# Altium PCB 06电机驱动模块TB6612-2.PcbDoc
Units mil, origin at the board's own origin, x right, y up, seen from the top; angles counter-clockwise.
Board outline 6000 x 4000 mil, 2 copper layers (Top Layer, Bottom Layer); 7 components, 34 nets, 165 pads, 34 vias.
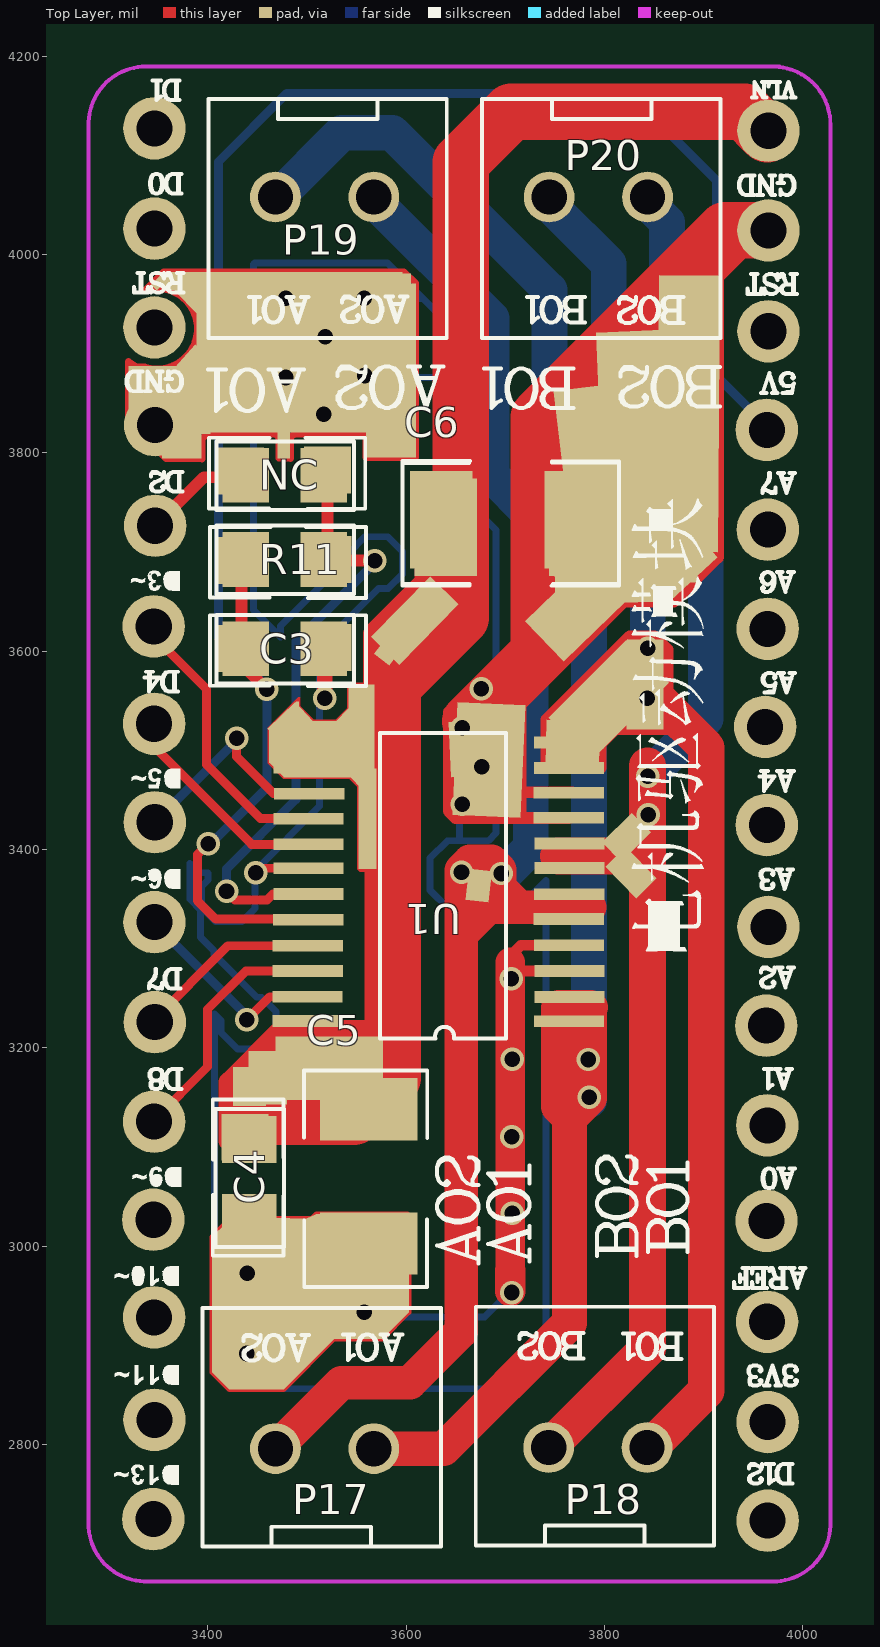
[diagram p0: Top Layer view]
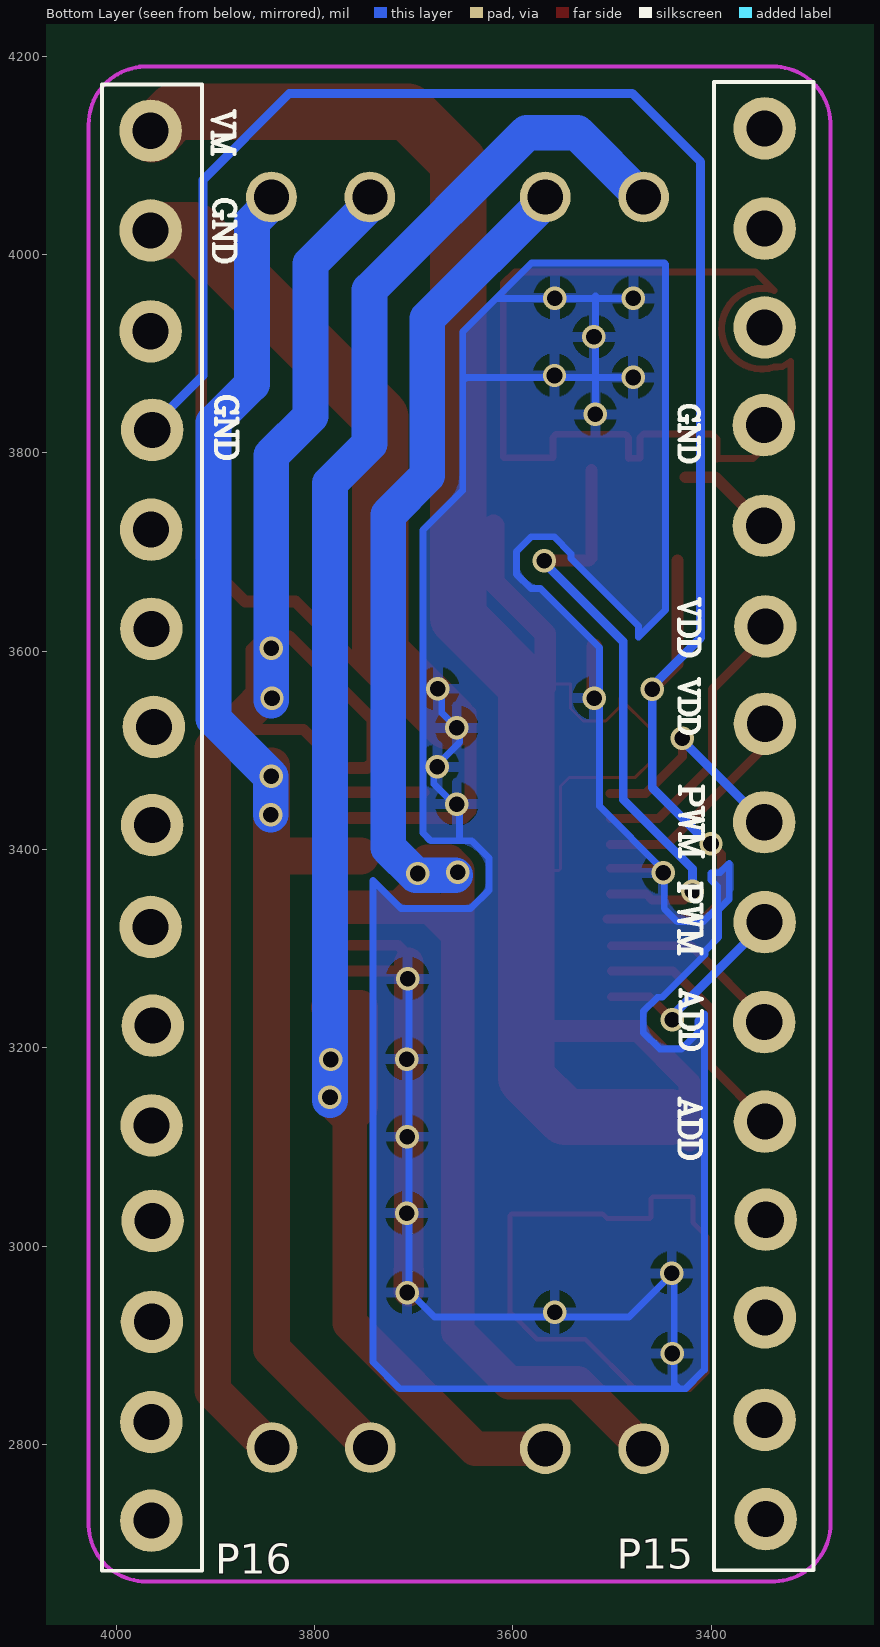
[diagram p1: Bottom Layer view, seen from below]
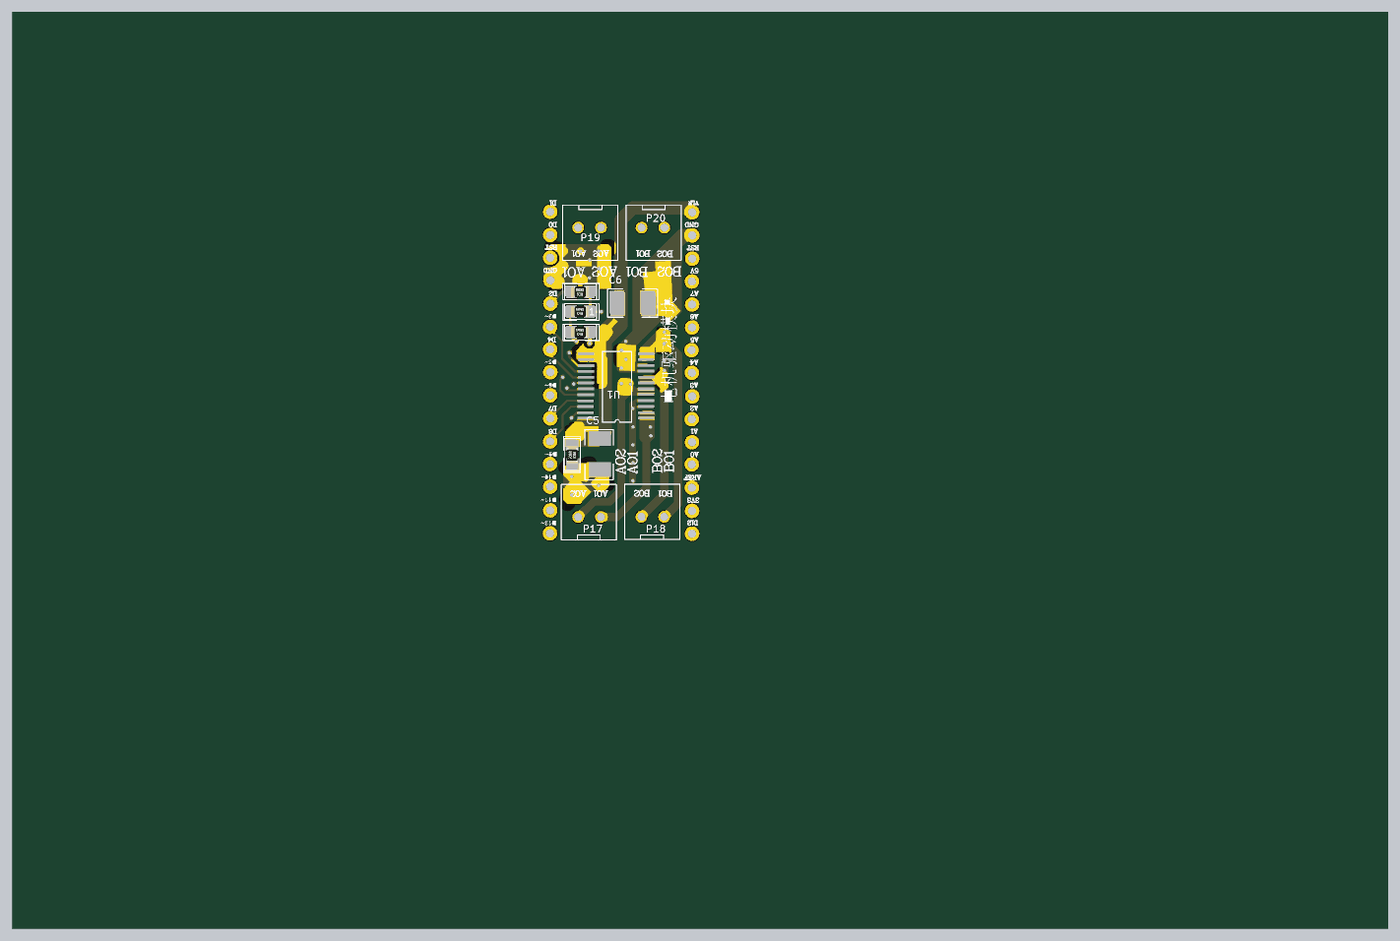
[diagram p2: 3D render of the assembled board from above, using the file's embedded part models]

## Layer stack, top to bottom
Top Solder: solder mask 0.4, Solder Resist, Dk 3.5
Top Layer: signal copper 1.4
Dielectric1: dielectric 12.6, FR-4, Dk 4.8
Bottom Layer: signal copper 1.4
Bottom Solder: solder mask 0.4, Solder Resist, Dk 3.5

## Board outline
1000,1000 7000,1000 7000,5000 1000,5000

## Design rules (kind name [scope] priority, off if disabled: settings)
Clearance [All] p1: gap=10 ignorepadtopadclearanceinfootprint=FALSE except(0: Arc-Hole Track-Hole SMDPad-Hole THPad-Hole Via-Hole Fill-Hole Poly-Hole Region-Hole Text-Hole)
PolygonConnect [All] p1: connectstyle=Relief reliefconductorwidth=10 reliefentries=4 polygonreliefangle="90 Angle" airgapwidth=10
RoutingVias [All] p1: holewidth=28 width=50 viastyle="Through Hole" minholewidth=28 minwidth=50 maxholewidth=28 maxwidth=50
SilkToSolderMaskClearance SilkscreenOverComponentPads [IsPad] p1: minsilkscreentomaskgap=10 clearancetoexposedcopper=TRUE
SolderMaskExpansion [All] p1: expansion=4
Width [All] p1: maxlimit=10 minlimit=10 preferedwidth=10
29 further rules are at their usual default settings.

## Components (designator, comment, footprint, x,y, rotation, side; value= is the part's Value field where it differs from the comment)
C3 "104 50V 10%" 0805-R 3477.49,3602.58 r180 top
C4 "104 50V 10%" 0805-R 3441.74,3068.33 r270 top
C5 "Comment" sma 3564.36,3068.69 r270 top
C6 "Comment" sma 3705.83,3722.76 r180 top
NC "1K 5%" 0805-R 3477.49,3777.58 r180 top
R11 "200K 5%" 0805-R 3477.49,3692.58 r180 top
U1 "6621FNG" sop24 3640.34,3372.19 r0 top

## Footprints (in the part's own frame and the unit in brackets; to place one, negate y for a bottom-side part, rotate by r counter-clockwise, add the part's x,y. Pads: shape width x height; smd on the part's side, far side on the other; paste and mask are expansions set on the pad)
0805-R [mm]
  rect 1.2x1.4 smd: 1(-1,0) 2(1,0)
  silkscreen extent -1.78,-0.86 1.75,0.89, body extent -0.97,-0.61 1.03,0.64, height 0.55
sma [mil]
  rect 62.99x98.43 smd paste+0 mask+2: 1(-69.49,-2.24) 1(65.83,-2.24)
  silkscreen extent -109,-67 110,57
sop24 [mil]
  rect 70.87x11.81 smd paste+0 mask+2: 1(-140,-145) 1(-140,-120.59) 1(-139.64,-94.64) 1(-139.64,-69.1) 1(-139.29,-42.79) 1(-138.93,-16.84) 1(-138.93,9.06) 1(-138.93,33.11) 1(-138.93,59.06) 1(-138.93,135.73) 1(-138.57,110.55) 1(-138.16,84.24) 1(123.37,-42.12) 1(123.63,59.83) 1(123.63,85.26) 1(123.84,-145.1) 1(123.84,-68.59) 1(123.84,110.19) 1(123.84,135.88) 1(124.09,-17.2) 1(124.35,-120.89) 1(124.35,-94.49) 1(124.35,9.21) 1(124.35,33.93)
  silkscreen extent -67,-163 60,146

## Free pads (board coordinates)
  rect 18.02x8.36 smd rot 45 paste-9.01 mask+24.99: 1(3351.88,3973.14)
  rect 10.67x9.14 smd paste-5.33 mask+28.66: 1(3354.31,3971.58)
  rect 75.44x16.89 smd paste-37.72 mask-3.72: 1(3357.49,3879.03)
  rect 82.97x54.92 smd paste-41.48 mask-7.49: 1(3361.25,3846.51)
  rect 39.82x34.96 smd paste-19.91 mask+14.09: 1(3373.77,3811.7)
  rect 47.19x18.32 smd paste-23.59 mask+10.4: 1(3378.88,3973.31)
  rect 33.73x24.43 smd rot 134.38 paste-16.86 mask+17.14: 1(3386.87,3959.77)
  rect 31.06x27.02 smd rot 48.01 paste-15.53 mask+18.47: 1(3386.93,3888.8)
  rect 0.2x31.22 smd paste-15.61 mask+33.9: 1(3421.62,2871.23)
  rect 24.54x44.19 smd rot 135 paste-22.09 mask+21.73: 1(3428.47,2879.92)
  rect 50.31x39.67 smd paste-25.16 mask+8.85: 1(3429.32,2893.31)
  rect 19.98x54 smd rot 45 paste-27 mask+24.01: 1(3430.32,2997.69)
  rect 47.24x47.24 smd paste+0 mask+2: 1(3432.98,3781.63) 1(3433.75,3602.76) 1(3433.75,3691.66) 1(3437.49,3109.93) 1(3438.46,3022.26) 1(3520.66,3782.61) 1(3521.42,3603.73) 1(3521.42,3692.63)
  rect 40.08x20.88 smd paste-20.04 mask+13.96: 1(3438.9,3039.56)
  rect 33.47x39.41 smd paste-19.7 mask+17.27: 1(3441.94,3161.12)
  rect 55.17x33.68 smd paste-27.58 mask+6.42: 1(3449.11,2872.45)
  rect 38.95x53.79 smd paste-26.89 mask+14.53: 1(3460.34,3170)
  rect 112.02x51.5 smd rot 5.9 paste-56.01 mask-22.01: 1(3462.53,2989.87)
  rect 71.73x100.54 smd rot 45 paste-50.27 mask-1.86: 1(3466.1,2916.52)
  rect 20.22x34.5 smd paste-17.25 mask+23.89: 1(3471.5,3504.74)
  rect 12.9x33.37 smd paste-16.68 mask+27.55: 1(3476.44,3811.22)
  rect 21.28x23.13 smd rot 135 paste-11.56 mask+23.36: 1(3477.09,3488.61)
  rect 44.44x65.78 smd rot 178.68 paste-32.89 mask+11.78: 1(3481.92,2995.73)
  rect 26.43x38.72 smd rot 133.51 paste-19.36 mask+20.79: 1(3483.19,3525.82)
  rect 171.41x40.69 smd paste-85.7: 1(3489.87,2926.68)
  rect 3.43x4.35 smd paste-2.17 mask+32.28: 1(3490.33,3547.05)
  rect 207.74x161.84 smd paste-103.87 mask-69.87: 1(3492.43,3901.55)
  rect 70.87x11.81 smd paste+0 mask+2: 1(3500.34,3227.19) 1(3500.34,3251.6) 1(3500.7,3277.55) 1(3500.7,3303.09) 1(3501.05,3329.4) 1(3501.41,3355.35) 1(3501.41,3381.25) 1(3501.41,3405.3) 1(3501.41,3431.25) 1(3501.41,3507.92) 1(3501.77,3482.74) 1(3502.18,3456.43) 1(3763.71,3330.07) 1(3763.97,3432.02) 1(3763.97,3457.45) 1(3764.18,3227.09) 1(3764.18,3303.6) 1(3764.18,3482.38) 1(3764.18,3508.07) 1(3764.43,3354.99) 1(3764.69,3251.3) 1(3764.69,3277.7) 1(3764.69,3381.4) 1(3764.69,3406.12)
  rect 198.48x60.85 smd paste-99.24: 1(3503.41,2963.84)
  rect 11.53x20.87 smd rot 23.27 paste-10.43 mask+28.23: 1(3508.28,3020.78)
  rect 73.29x56.76 smd paste-36.64 mask-2.64: 1(3513.08,3501.29)
  rect 11.21x18.78 smd paste-9.39 mask+28.39: 1(3515.05,3023.26)
  rect 107.97x63.95 smd paste-53.98 mask-19.98: 1(3522.36,3179.73)
  rect 17.81x16.07 smd rot 45 paste-8.9 mask+25.09: 1(3541.08,3530.18)
  rect 25.26x22.21 smd rot 131.96 paste-12.63 mask+21.37: 1(3551.69,3480.67)
  rect 26.51x93.81 smd paste-46.91 mask+20.75: 1(3554.95,3519.61)
  rect 18.27x101.7 smd paste-50.85 mask+24.86: 1(3561.01,3431.17)
  rect 98.43x62.99 smd paste+0 mask+2: 1(3562.12,3002.86) 1(3562.12,3138.19)
  rect 38.29x51.46 smd rot 45 paste-25.73 mask+14.86: 1(3570.92,2938.07)
  rect 20.68x19.34 smd rot 52.85 paste-10.34 mask+23.66: 1(3581.23,3599.58)
  rect 50.21x175.29 smd paste-87.64 mask+8.89: 1(3584.5,3883)
  rect 19.91x19.34 smd rot 0.15 paste-9.95 mask+24.05: 1(3592.67,2943.06)
  rect 13.92x24.67 smd paste-12.34 mask+27.04: 1(3597.94,3968.34)
  rect 85.67x40.21 smd rot 45.56 paste-42.84 mask-8.84: 1(3608.56,3630.93)
  rect 62.99x98.43 smd paste+0 mask+2: 1(3635.51,3732.76) 1(3770.83,3732.76)
  rect 21.88x56.12 smd rot 2.55 paste-28.06 mask+23.06: 1(3654.95,3501.05)
  rect 23.28x31.8 smd rot 173.56 paste-15.9 mask+22.36: 1(3673.03,3363.68)
  rect 68.89x113.81 smd rot 177.38 paste-56.9 mask-0.44: 1(3683.44,3490.43)
  rect 53.85x47.83 smd rot 179.18 paste-26.93 mask+7.08: 1(3767.88,3506.75)
  rect 130.96x56.36 smd rot 43.99 paste-65.48 mask-31.48: 1(3786.14,3655.41)
  rect 70.05x110.59 smd rot 6.84 paste-55.3 mask-1.02: 1(3789.88,3811.67)
  rect 110.6x61.23 smd rot 45 paste-55.3 mask-21.3: 1(3804.2,3550.65)
  rect 115.87x56.1 smd rot 1.65 paste-57.94 mask-23.93: 1(3807.77,3676.48)
  rect 42.42x27.78 smd rot 44.8 paste-21.21 mask+12.79: 1(3822.08,3412.44)
  rect 44.84x28.81 smd rot 134.49 paste-22.42 mask+11.58: 1(3826.61,3376.78)
  rect 37.08x91.05 smd rot 179.72 paste-45.52 mask+15.46: 1(3840.82,3566.64)
  rect 91.9x256.41 smd rot 2.39 paste-128.21 mask-11.95: 1(3842.36,3795.39)
  rect 65.97x86.88 smd rot 42.39 paste-43.44 mask+1.01: 1(3860.49,3704.42)
  rect 279.02x61.75 smd rot 89.53 paste-139.51: 1(3884.4,3839.51)
  round 51.18 hole 35.43: 4(3468.04,2795.99) 4(3468.04,4057.96) 4(3567.28,2795.99) 4(3567.28,4057.96) 4(3743.6,2797.11) 4(3744.11,4057.96) 4(3842.84,2797.11) 4(3843.35,4057.96)
  round 62.99 hole 36.43: 5(3345,2725) 5(3345,3026.87) 5(3345.36,3625.02) 5(3345.77,2928.34) 5(3345.77,3125.75) 5(3345.77,3526.86) 5(3346.13,2825.01) 5(3346.13,3326.89) 5(3346.13,3926.48) 5(3346.13,4026.13) 5(3346.13,4127.21) 5(3346.49,3226.11) 5(3346.49,3427.61) 5(3346.84,3726.51) 5(3346.84,3827.96) 5(3961.84,3523.68) 5(3962.96,3222.58) 5(3963.22,3025.64) 5(3963.53,3424.8) 5(3963.53,3823.14) 5(3963.78,2923.94) 5(3964.09,3122.01) 5(3964.34,2723.41) 5(3964.34,2822.86) 5(3964.4,3622.61) 5(3964.6,3722.57) 5(3965.17,3322.03) 5(3965.17,3922.59) 5(3965.17,4024.23) 5(3965.17,4124.8)

## Via types
v1: diameter 23.62, hole 15.75, Top Layer to Bottom Layer, 34 vias

## Nets (pads, with @x,y where several pads share a name; then routed paths per layer and width w, separated by ;. In a path a pad name is that pad's centre, name@x,y a point inside that pad or via, vN(x,y) a via of type N, cw(c..) or ccw(c..) an arc to the next point about the centre after c; other vN are vias at no path point)
$Net0: C3.1 C4.2 C5.1@3562.12,3002.86 C6.1@3775.32,3725 pad.1@3351.88,3973.14 pad.1@3354.31,3971.58 pad.1@3357.49,3879.03 pad.1@3361.25,3846.51 pad.1@3373.77,3811.7 pad.1@3378.88,3973.31 pad.1@3386.87,3959.77 pad.1@3386.93,3888.8 pad.1@3421.62,2871.23 pad.1@3428.47,2879.92 pad.1@3429.32,2893.31 pad.1@3430.32,2997.69 pad.1@3438.9,3039.56 pad.1@3438.46,3022.26 pad.1@3449.11,2872.45 pad.1@3462.53,2989.87 pad.1@3466.1,2916.52 pad.1@3476.44,3811.22 pad.1@3481.92,2995.73 pad.1@3489.87,2926.68 pad.1@3492.43,3901.55 pad.1@3501.41,3381.25 pad.1@3503.41,2963.84 pad.1@3508.28,3020.78 pad.1@3515.05,3023.26 pad.1@3521.42,3603.73 pad.1@3562.12,3002.86 pad.1@3570.92,2938.07 pad.1@3584.5,3883 pad.1@3592.67,2943.06 pad.1@3597.94,3968.34 pad.1@3654.95,3501.05 pad.1@3683.44,3490.43 pad.1@3763.97,3432.02 pad.1@3763.97,3457.45 pad.1@3764.18,3303.6 pad.1@3764.69,3277.7 pad.1@3770.83,3732.76 pad.1@3786.14,3655.41 pad.1@3789.88,3811.67 pad.1@3807.77,3676.48 pad.1@3842.36,3795.39 pad.1@3860.49,3704.42 pad.1@3884.4,3839.51 pad.5@3346.84,3827.96 pad.5@3965.17,4024.23 U1.1@3501.41,3381.25 U1.1@3763.97,3432.02 U1.1@3763.97,3457.45 U1.1@3764.18,3303.6 U1.1@3764.69,3277.7 | length 8989.2
  Top Layer w4.94: C4.2@3460.47,3029.12 3460.47,3048.46 3458.93,3050 3418.86,3050 3418.29,3049.44 3418.29,3023.85 3404.17,3009.72 3404.17,2872.97 3421.52,2855.62 3476.28,2855.62 3527.01,2906.34 3575.57,2906.34 3602.65,2933.41 3602.65,3031.32 3601.32,3032.65 3509.45,3032.65 3504.9,3028.1 C4.2@3461.49,3028.1
  Top Layer w6.94: pad.1@3319.77,3828.11 3319.77,3892.03 3328.27,3886.81 3333.28,3886.66 3336.35,3886.56 3339.08,3885.78 3341.85,3885.2 3344.66,3884.81 3347.49,3884.62 3350.33,3884.63 3353.16,3884.84 3355.96,3885.24 3358.74,3885.83 3361.46,3886.62 3364.12,3887.6 3366.71,3888.76 3369.21,3890.1 3371.61,3891.6 3373.9,3893.28 3376.07,3895.1 3378.1,3897.08 3380,3899.19 3381.74,3901.43 3383.32,3903.78 3384.73,3906.24 3385.97,3908.8 3387.02,3911.43 3387.89,3914.13 3388.57,3916.88 3389.06,3919.67 3389.35,3922.5 3389.44,3925.33 3389.33,3928.16 3389.03,3930.98 3388.53,3933.77 3387.84,3936.52 3386.95,3939.22 3385.88,3941.85 3384.64,3944.39 3383.21,3946.84 3381.62,3949.19 3379.87,3951.42 3377.97,3953.52 3375.92,3955.49 3373.74,3957.31 3371.45,3958.97 3369.04,3960.46 3366.53,3961.79 3363.94,3962.94 3361.27,3963.9 3358.54,3964.67 3355.77,3965.26 3352.96,3965.65 3350.13,3965.84 3347.29,3965.83 3344.46,3965.62 3341.66,3965.22 3338.88,3964.63 3336.35,3963.89 3336.71,3963.89 3355.29,3982.47 3597.79,3982.47 3609.61,3970.65 3609.61,3795.92 3608.79,3795.1 3559.66,3795.1 3559.4,3795.35 3559.4,3815.67 3556.28,3818.79 3486.57,3818.79 3483.19,3815.42 3483.19,3794.23 3482.88,3794.53 3471.57,3794.53 3471.88,3794.84 3471.88,3815.36 3468.2,3819.05 3399.05,3819.05 3393.98,3813.98 3393.98,3793.92 3393.68,3794.23 3357.85,3794.23 3327.35,3824.73 3323.15,3824.73 pad.1@3319.77,3828.11
  Top Layer w8.94: v1(3448.44,3376.59) 3453.1,3381.25 pad.1@3501.41,3381.25
  Top Layer w10.94: 3709.11,3296.95 3715.76,3303.6 pad.1@3764.18,3303.6 ; v1@3712.54,3277.7 pad.1@3764.69,3277.7
  Top Layer w11.94: 3651.17,3547.02 3642.77,3538.63 3642.77,3438.83 3649.58,3432.02 pad.1@3763.97,3432.02 ; pad.1@3690.12,3457.81 pad.1@3767.35,3457.81 ; 3715.25,3432.02 3715.25,3546.3 3819.04,3650.1 3869.66,3650.1 3914.14,3694.57 3914.14,3976.48 pad.5@3946.53,4008.88
  Top Layer w15.94: v1(3517.9,3552.7) C3.1@3517.9,3604.75
  Top Layer w29.94: 3704.96,2975.89 3704.96,3286.3
  Top Layer w30.94: v1@3704.96,2954.91 3704.96,2975.89
  Top Layer w56.94: pad.1@3664.63,3529.57 3733.47,3598.41 3733.47,3836.04 3921.66,4024.23 pad.5@3965.17,4024.23
  Bottom Layer w6.94: 3406.83,2875.52 3406.83,3234.15 3413.28,3227.7 3413.28,3215.37 3429.71,3198.94 3451.77,3198.94 3468.5,3215.67 3468.5,3236.91 3454.27,3251.14 3449.41,3251.14 3405.91,3294.65 3405.91,3298.43 3392.7,3311.64 3392.7,3339.11 3381.74,3350.07 3381.74,3386.12 3391.17,3376.69 3399.72,3376.69 3400.23,3376.18 3400.23,3369.52 3393.73,3363.02 3393.73,3341.58 3408.06,3327.25 3433.7,3327.25 3447.32,3340.86 3447.32,3378.63 3512.42,3443.74 3512.42,3603.63 3571.99,3663.2 3581.82,3663.2 3596.25,3677.63 3596.25,3700.46 3581.26,3715.46 3558.43,3715.46 3541.23,3698.26 3541.23,3693.45 3473.21,3625.43 3473.21,3614.12 3445.83,3641.5 3445.83,3990.2 3447.21,3991.58 3580.95,3991.58 3650.45,3922.08 3650.45,3762.08 3690.37,3722.16 3690.37,3416.56 3682.7,3408.88 3641.34,3408.88 3623.99,3391.53 3623.99,3359.03 3642.47,3340.56 3712.64,3340.56 3741.04,3368.96 3741.04,2883.51 3713.97,2856.43 3425.92,2856.43 3408.01,2874.35 ; 3432.42,2856.43 3437.18,2861.19 3437.18,2974.41 3482.88,2928.7 3679.11,2928.7 3704.81,2954.39 v1@3704.81,3275.4 ; v1(3478.38,3955.75) 3616.78,3955.75 ; v1(3478.64,3876.06) 3646.87,3876.06 3650.45,3872.48 ; v1(3516.77,3838.8) 3516.77,3958.41 ; 3654.24,3408.88 3653.83,3409.29 3653.83,3440.31 3679.63,3466.1 3679.63,3482.28 3653.42,3508.48 3653.42,3519.49 3671.59,3537.65 v1@3671.59,3560.53
  other v1: 3439.18,2892 3557.71,2933.51 3706.44,2953.42 3439.74,2972.72 3706.91,3033.47 3706.44,3110.5 3706.91,3188.8 3706.04,3269.67 3656.49,3445.78 3675.99,3483.45 3656.49,3522.81 3675.58,3562.22 3557.97,3878.01 3518.15,3916.96 3557.56,3956.06
$Net1: NC.1 pad.1@3501.41,3355.35 pad.1@3520.66,3782.61 pad.1@3521.42,3692.63 R11.1 U1.1@3501.41,3355.35 | length 621.5
  Top Layer w8.94: v1(3418.81,3357.96) 3427.4,3349.36 3459.7,3349.36 3465.69,3355.35 pad.1@3501.41,3355.35
  Top Layer w11.94: NC.1@3520.66,3782.61 3520.66,3693.81 3523.11,3691.35 v1(3568.36,3691.35)
  Bottom Layer w8.94: v1(3418.81,3357.96) 3418.81,3380.68 3488.67,3450.54 3488.67,3609.72 3568.36,3689.41 v1(3568.36,3691.35)
$Net2: C3.2 pad.1@3433.75,3602.76 pad.1@3433.75,3691.66 pad.1@3501.05,3329.4 pad.5@3963.53,3823.14 R11.2 U1.1@3501.05,3329.4 | length 1899.5
  Top Layer w8.94: v1(3400.18,3405.76) 3389.38,3394.96 3389.38,3348.54 3408.06,3329.86 pad.1@3505.1,3329.86
  Top Layer w11.94: R11.2@3433.75,3691.66 3433.75,3587.25 v1(3459.44,3561.56)
  Bottom Layer w8.94: v1(3400.18,3405.76) 3402.84,3405.76 3459.44,3462.37 3459.44,3564.88 3410.67,3613.66 3410.67,4093.43 3479.66,4162.42 3825.14,4162.42 3912.5,4075.06 3912.5,3877.91 3963.53,3826.88 pad.5@3963.53,3823.14
$Net3: pad.1@3502.18,3456.43 pad.5@3346.49,3427.61 U1.1@3502.18,3456.43 | length 229.5
  Top Layer w8.94: v1(3428.99,3512.47) 3428.99,3493.74 3466.3,3456.43 pad.1@3502.18,3456.43
  Bottom Layer w8.94: pad.5@3346.49,3427.61 3431.55,3512.68 v1@3431.55,3514.47
$Net4: pad.1@3500.34,3251.6 pad.5@3346.13,3326.89 U1.1@3500.34,3251.6 | length 207.8
  Top Layer w8.94: v1(3439.13,3228.42) 3462.31,3251.6 pad.1@3500.34,3251.6
  Bottom Layer w8.94: pad.5@3346.13,3326.89 3346.13,3325.61 3439.13,3232.61 v1(3439.13,3228.42)
$Net5: pad.1@3764.18,3227.09 pad.1@3764.69,3251.3 pad.4@3468.04,4057.96 pad.4@3567.28,2795.99 U1.1@3764.18,3227.09 U1.1@3764.69,3251.3 | length 1978.5
  Top Layer w34.94: pad.4@3567.28,2795.99 3637.76,2795.99 3764.53,2922.77 3764.53,3129.59 3753.38,3140.75 3753.38,3240.7 3753.69,3241.01 3785.83,3241.01 3784.96,3240.14 3784.96,3149.29 3767.45,3131.79
  Bottom Layer w32.94: pad.4@3464.05,4056.53 pad.4@3468.81,4056.53
  Bottom Layer w35.94: pad.4@3468.81,4056.53 3534.94,4122.66 ; 3528.28,4116 3534.94,4122.66 ; 3551.47,4122.66 3585.97,4122.66 3744.47,3964.15 3744.47,3842.18 ; 3566.67,4122.66 3534.94,4122.66 ; 3744.47,3867.62 3744.47,3809.22 3784.29,3769.4 v1@3784.29,3147.45
  other v1: 3784.34,3150.32 3783.52,3188.39
$Net6: pad.1@3673.03,3363.68 pad.1@3763.71,3330.07 pad.1@3764.43,3354.99 pad.4@3468.04,2795.99 pad.4@3567.28,4057.96 U1.1@3763.71,3330.07 U1.1@3764.43,3354.99 | length 1766.4
  Top Layer w33.94: pad.4@3468.04,2795.99 3534.58,2862.52 3603.72,2862.52 3655.37,2914.17 3655.37,3379.15 3664.17,3387.95 3686.18,3387.95 3694.26,3379.86 3694.26,3361.59 3713.81,3342.04 3785.16,3342.04 ; 3655.37,3294.8 3655.37,3314.4 3683,3342.04 3725.69,3342.04
  Bottom Layer w35.94: pad.4@3567.28,4057.96 3567.28,4054.28 3686.13,3935.43 3686.13,3777.13 3725.48,3737.77 3725.48,3401.98 3697.64,3374.13 v1@3657.87,3374.13
  other v1: 3695.9,3375.92 3655.67,3377.2
$Net7: pad.1@3764.18,3482.38 pad.1@3764.18,3508.07 pad.1@3767.88,3506.75 pad.1@3804.2,3550.65 pad.1@3840.82,3566.64 pad.4@3744.11,4057.96 pad.4@3842.84,2797.11 U1.1@3764.18,3482.38 U1.1@3764.18,3508.07 | length 1749.4
  Top Layer w10.94: pad.1@3764.18,3482.38 3796.42,3482.38 3796.37,3482.43 3796.37,3506.28 3811.11,3521.02 3864.54,3521.02
  Top Layer w11.94: pad.1@3764.18,3482.38 3747.03,3482.38 3741.3,3488.11 3741.3,3531.05 3825.29,3615.04 3850.26,3615.04 3863.67,3601.63 3863.67,3558.69
  Top Layer w36.94: pad.4@3841.46,2793.28 3902.62,2854.44 3902.62,3502.75 pad.1@3858.09,3547.28
  Bottom Layer w35.94: pad.4@3748.01,4058.22 3748.01,4046.75 3803.99,3990.76 3803.99,3837.11 3843.51,3797.61 v1@3843.51,3550.4
  other v1: 3842.79,3552.45 3843.61,3602.86
$Net8: pad.1@3764.69,3381.4 pad.1@3764.69,3406.12 pad.1@3822.08,3412.44 pad.1@3826.61,3376.78 pad.4@3743.6,2797.11 pad.4@3843.35,4057.96 U1.1@3764.69,3381.4 U1.1@3764.69,3406.12 | length 1469.8
  Top Layer w36.94: pad.4@3743.6,2797.11 3843.25,2896.77 v1@3843.25,3484.53 ; 3753.22,3393.58 3837.11,3393.58
  Bottom Layer w35.94: v1(3844.07,3435.19) 3844.07,3474.09 3901.8,3531.82 3901.8,3830.61 3862.96,3869.46 3862.96,4032.63 pad.4@3848.98,4046.6
  other v1: 3843.61,3474.14
$Net9: pad.5@3346.13,4026.13
$Net10: pad.5@3346.13,3926.48
$Net11: pad.5@3346.13,4127.21
$Net12: C4.1 C5.1@3562.12,3138.18 C6.1@3640,3725 pad.1@3437.49,3109.93 pad.1@3441.94,3161.12 pad.1@3460.34,3170 pad.1@3471.5,3504.74 pad.1@3477.09,3488.61 pad.1@3483.19,3525.82 pad.1@3490.33,3547.05 pad.1@3500.34,3227.19 pad.1@3501.41,3507.92 pad.1@3501.77,3482.74 pad.1@3513.08,3501.29 pad.1@3522.36,3179.73 pad.1@3541.08,3530.18 pad.1@3551.69,3480.67 pad.1@3554.95,3519.61 pad.1@3561.01,3431.17 pad.1@3562.12,3138.19 pad.1@3581.23,3599.58 pad.1@3608.56,3630.93 pad.1@3635.51,3732.76 pad.5@3965.17,4124.8 U1.1@3500.34,3227.19 U1.1@3501.41,3507.92 U1.1@3501.77,3482.74 | length 2285.7
  Top Layer w2.94: 3565.8,3378.84 3553.36,3378.84 3551.88,3380.32 3551.88,3463.85 3542.82,3472.91 3476.44,3472.91 3461.39,3487.96 3461.39,3521.99 3492.05,3552.65 3492.05,3543.85 3506.33,3529.57 3529.1,3529.57 3541.69,3542.16 3541.69,3566.52 3541.39,3566.83 3563.7,3566.83 pad.1@3567.28,3563.25
  Top Layer w21.94: C4.1@3421.83,3106.71 3421.83,3165.16 3473.88,3217.21 3572.96,3217.21 3586.53,3203.65 ; pad.1@3567.28,3563.25 3567.28,3617.45 3619.39,3669.55 pad.1@3619.39,3726.72
  Top Layer w56.94: C4.1@3441.27,3130.41 3547.12,3130.41 3586.53,3169.82 3586.53,3565.45 3654.85,3633.77 3654.85,4092.87 3706.09,4144.1 3941.11,4144.1 pad.5@3963.94,4121.27
$Net13: pad.5@3965.17,3922.59
$Net14: pad.5@3964.6,3722.57
$Net15: pad.5@3964.4,3622.61
$Net16: pad.5@3961.84,3523.68
$Net17: pad.5@3963.53,3424.8
$Net18: pad.5@3965.17,3322.03
$Net19: pad.5@3962.96,3222.58
$Net20: pad.5@3964.09,3122.01
$Net21: pad.5@3963.22,3025.64
$Net22: pad.5@3963.78,2923.94
$Net23: pad.5@3964.34,2822.86
$Net24: pad.5@3964.34,2723.41
$Net25: pad.5@3345,2725
$Net26: pad.5@3346.13,2825.01
$Net27: pad.5@3345.77,2928.34
$Net28: pad.5@3345,3026.87
$Net29: pad.1@3500.7,3277.55 pad.5@3345.77,3125.75 U1.1@3500.7,3277.55 | length 252.6
  Top Layer w8.94: pad.5@3345.77,3125.75 3345.77,3127.28 3399.61,3181.13 3399.61,3238.91 3438.26,3277.55 pad.1@3500.7,3277.55
$Net30: pad.1@3500.7,3303.09 pad.5@3346.49,3226.11 U1.1@3500.7,3303.09 | length 189.4
  Top Layer w8.94: pad.5@3343.21,3226.11 3420.19,3303.09 pad.1@3500.7,3303.09
$Net31: pad.1@3501.41,3405.3 pad.5@3345.77,3526.86 U1.1@3501.41,3405.3 | length 219.6
  Top Layer w8.94: pad.5@3345.77,3526.86 3345.77,3503.62 3444.09,3405.3 pad.1@3501.41,3405.3
$Net32: pad.1@3501.41,3431.25 pad.5@3345.36,3625.02 U1.1@3501.41,3431.25 | length 286.7
  Top Layer w8.94: pad.5@3345.36,3625.02 3345.36,3614.94 3398.69,3561.61 3398.69,3485.7 3453.15,3431.25 pad.1@3501.41,3431.25
$Net33: NC.2 pad.1@3432.98,3781.63 pad.5@3346.84,3726.51 | length 99.3
  Top Layer w11.94: pad.5@3346.84,3726.51 3347.15,3726.51 3396.03,3775.39 NC.2@3425.92,3775.39

## Polygon pours and split planes (outlines as drawn)
$Net0 on Bottom Layer "Bottom Layer-$Net0" (hatched Horizontal grid 1 track 1, pour order 1000): 121 vertices, not listed, extent 3377.29,2856.65 3740.54,3989.7
no net on Top Overlay (hatched Horizontal grid 1 track 1): 248 vertices, not listed, extent 3323.05,2760.26 3335.39,2779.91
no net on Top Overlay (hatched Horizontal grid 1 track 1): 107 vertices, not listed, extent 3305.87,2767.95 3320.4,2772.37
no net on Top Overlay (hatched Horizontal grid 1 track 1): 84 vertices, not listed, extent 3354.55,2760.38 3370.4,2779.52
no net on Top Overlay (hatched Horizontal grid 1 track 1): 40 vertices, not listed, extent 3342.1,2760.27 3350.25,2779.52
no net on Top Overlay (hatched Horizontal grid 1 track 1): 107 vertices, not listed, extent 3306.28,2868.73 3320.81,2873.15
no net on Top Overlay (hatched Horizontal grid 1 track 1): 84 vertices, not listed, extent 3354.96,2861.16 3370.81,2880.3
no net on Top Overlay (hatched Horizontal grid 1 track 1): 40 vertices, not listed, extent 3342.51,2861.04 3350.59,2880.3
no net on Top Overlay (hatched Horizontal grid 1 track 1): 40 vertices, not listed, extent 3326.85,2861.04 3334.96,2880.3
no net on Top Overlay (hatched Horizontal grid 1 track 1): 107 vertices, not listed, extent 3306.28,2968.22 3320.81,2972.64
no net on Top Overlay (hatched Horizontal grid 1 track 1): 84 vertices, not listed, extent 3354.96,2960.66 3370.81,2979.79
no net on Top Overlay (hatched Horizontal grid 1 track 1): 40 vertices, not listed, extent 3342.51,2960.54 3350.59,2979.79
no net on Top Overlay (hatched Horizontal grid 1 track 1): 130 vertices, not listed, extent 3323.65,2960.53 3335.72,2980.18
no net on Top Overlay (hatched Horizontal grid 1 track 1): 204 vertices, not listed, extent 3341.32,3060.44 3353.76,3080.09
no net on Top Overlay (hatched Horizontal grid 1 track 1): 107 vertices, not listed, extent 3324.04,3068.12 3338.57,3072.55
no net on Top Overlay (hatched Horizontal grid 1 track 1): 84 vertices, not listed, extent 3357.06,3060.56 3372.91,3079.7
no net on Top Overlay (hatched Horizontal grid 1 track 1): 107 vertices, not listed, extent 3323.37,3368.72 3337.9,3373.14
no net on Top Overlay (hatched Horizontal grid 1 track 1): 200 vertices, not listed, extent 3340.33,3361.03 3352.81,3380.66
no net on Top Overlay (hatched Horizontal grid 1 track 1): 84 vertices, not listed, extent 3356.39,3361.15 3372.24,3380.29
no net on Top Overlay (hatched Horizontal grid 1 track 1): 162 vertices, not listed, extent 3340.18,3462.6 3352.67,3481.86
no net on Top Overlay (hatched Horizontal grid 1 track 1): 107 vertices, not listed, extent 3323.37,3469.89 3337.9,3474.32
no net on Top Overlay (hatched Horizontal grid 1 track 1): 84 vertices, not listed, extent 3356.39,3462.33 3372.24,3481.47
no net on Top Overlay (hatched Horizontal grid 1 track 1): 248 vertices, not listed, extent 3339.74,3661.61 3352.07,3681.26
no net on Top Overlay (hatched Horizontal grid 1 track 1): 107 vertices, not listed, extent 3322.55,3669.3 3337.08,3673.72
no net on Top Overlay (hatched Horizontal grid 1 track 1): 84 vertices, not listed, extent 3355.58,3661.73 3371.43,3680.87
no net on Top Overlay (hatched Horizontal grid 1 track 1): 199 vertices, not listed, extent 3827.98,3694.57 3898.8,3753.94
no net on Top Overlay (hatched Horizontal grid 1 track 1): 84 vertices, not listed, extent 3828.89,3682.57 3887.51,3712.46
no net on Top Overlay (hatched Horizontal grid 1 track 1): 64 vertices, not listed, extent 3827.69,3629.03 3847.42,3673.35
no net on Top Overlay (hatched Horizontal grid 1 track 1): 194 vertices, not listed, extent 3846.95,3623.2 3899.31,3674.97
no net on Top Overlay (hatched Horizontal grid 1 track 1): 167 vertices, not listed, extent 3828.01,3603.38 3899.25,3631.56
no net on Top Overlay (hatched Horizontal grid 1 track 1): 230 vertices, not listed, extent 3828.91,3547.97 3898.8,3593.86
no net on Top Overlay (hatched Horizontal grid 1 track 1): 3839.92,3535.57 3839.99,3534.89 3840.07,3534.1 3840.14,3533.14 3840.29,3532.07 3840.59,3531.02 3840.81,3530.21 3839.1,3528.5 3839.1,3549.59 3835.59,3553.1 3839.92,3557.42
no net on Top Overlay (hatched Horizontal grid 1 track 1): 143 vertices, not listed, extent 3851.26,3525.68 3886.67,3561.73
no net on Top Overlay (hatched Horizontal grid 1 track 1): 144 vertices, not listed, extent 3844.62,3488.4 3884.59,3513.46
no net on Top Overlay (hatched Horizontal grid 1 track 1): 41 vertices, not listed, extent 3832.25,3481.59 3896.48,3517.2
no net on Top Overlay (hatched Horizontal grid 1 track 1): 146 vertices, not listed, extent 3831.86,3449.11 3899.03,3479.71
no net on Top Overlay (hatched Horizontal grid 1 track 1): 48 vertices, not listed, extent 3876.52,3446.79 3886.2,3470.45
no net on Top Overlay (hatched Horizontal grid 1 track 1): 150 vertices, not listed, extent 3833.1,3388.01 3898.17,3439.11
no net on Top Overlay (hatched Horizontal grid 1 track 1): 158 vertices, not listed, extent 3827.62,3367.16 3899.9,3396.9
no net on Top Overlay (hatched Horizontal grid 1 track 1): 167 vertices, not listed, extent 3828.33,3298.01 3896.71,3358.84
no net on Top Overlay (hatched Horizontal grid 1 track 1): 74 vertices, not listed, extent 3358.74,2763.79 3366.33,2776.12
no net on Top Overlay (hatched Horizontal grid 1 track 1): 74 vertices, not listed, extent 3359.15,2864.57 3366.74,2876.89
no net on Top Overlay (hatched Horizontal grid 1 track 1): 74 vertices, not listed, extent 3359.15,2964.06 3366.74,2976.39
no net on Top Overlay (hatched Horizontal grid 1 track 1): 124 vertices, not listed, extent 3327.73,2963.74 3331.64,2976.98
no net on Top Overlay (hatched Horizontal grid 1 track 1): 68 vertices, not listed, extent 3345.64,3063.65 3349.98,3070.09
no net on Top Overlay (hatched Horizontal grid 1 track 1): 74 vertices, not listed, extent 3361.25,3063.96 3368.84,3076.29
no net on Top Overlay (hatched Horizontal grid 1 track 1): 67 vertices, not listed, extent 3344.11,3371.04 3348.48,3377.46
no net on Top Overlay (hatched Horizontal grid 1 track 1): 74 vertices, not listed, extent 3360.59,3364.55 3368.17,3376.88
no net on Top Overlay (hatched Horizontal grid 1 track 1): 74 vertices, not listed, extent 3360.59,3465.74 3368.17,3478.06
no net on Top Overlay (hatched Horizontal grid 1 track 1): 74 vertices, not listed, extent 3359.77,3665.14 3367.35,3677.47
no net on Top Overlay (hatched Horizontal grid 1 track 1): 18 vertices, not listed, extent 3847.05,3725.89 3866.67,3738.63

## Keep-outs
Keep-Out Layer:
  lines w3.94: 3969.67,4189.45 3971.69,4189.41 3975.73,4189.13 3979.73,4188.57 3983.69,4187.73 3987.57,4186.61 3991.37,4185.23 3995.07,4183.59 3998.64,4181.69 4002.07,4179.54 4005.34,4177.17 4008.44,4174.57 4011.35,4171.76 4014.05,4168.75 4016.54,4165.57 4018.81,4162.21 4020.83,4158.71 4022.6,4155.08 4024.12,4151.33 4025.37,4147.48 4026.34,4143.56 4027.05,4139.57 4027.47,4135.55 4027.61,4131.51 4027.6,2720.19 ; 3976.53,4189.5 3337.63,4189.5 3333.59,4189.36 3329.57,4188.94 3325.58,4188.23 3321.66,4187.26 3317.81,4186.01 3314.06,4184.49 3310.43,4182.72 3306.93,4180.7 3303.57,4178.43 3300.39,4175.94 3297.38,4173.24 3294.57,4170.33 3291.97,4167.23 3289.6,4163.96 3287.45,4160.53 3285.55,4156.96 3283.91,4153.26 3282.53,4149.46 3281.41,4145.58 3280.57,4141.62 3280.01,4137.62 3279.73,4133.58 3279.69,4131.56 3279.7,2720.09 3279.83,2716.05 3280.25,2712.03 3280.96,2708.04 3281.93,2704.12 3283.18,2700.27 3284.7,2696.52 3286.47,2692.89 3288.49,2689.39 3290.76,2686.03 3293.25,2682.85 3295.95,2679.84 3298.86,2677.03 3301.96,2674.43 3305.23,2672.06 3308.66,2669.91 3312.23,2668.01 3315.93,2666.37 3319.73,2664.99 3323.61,2663.87 3327.57,2663.03 3331.57,2662.47 3335.61,2662.19 3337.63,2662.15 3969.77,2662.15 3973.81,2662.29 3977.83,2662.71 3981.82,2663.42 3985.74,2664.39 3989.59,2665.64 3993.34,2667.16 3996.97,2668.93 4000.47,2670.95 4003.83,2673.22 4007.01,2675.71 4010.02,2678.41 4012.83,2681.32 4015.43,2684.42 4017.8,2687.69 4019.95,2691.12 4021.85,2694.69 4023.49,2698.39 4024.87,2702.19 4025.99,2706.07 4026.83,2710.03 4027.39,2714.03 4027.67,2718.07 4027.71,2720.09

## Silkscreen, mask and mechanical layers (free items; w line width, h text height)
Top Overlay:
  drawing of 2438 lines, arcs and shapes, not listed
  text "P20" at 3760,4085 h30
  text "P19" at 3475,4000 h30
  text "P17" at 3485,2730 h30
  text "P18" at 3760,2730 h30
Bottom Overlay:
  drawing of 473 lines, arcs and shapes, not listed
  text "P15" at 3495,2675 h30
  text "P16" at 3900,2670 h30